# EAGLE board bonkout (EAGLE 9.6.2)
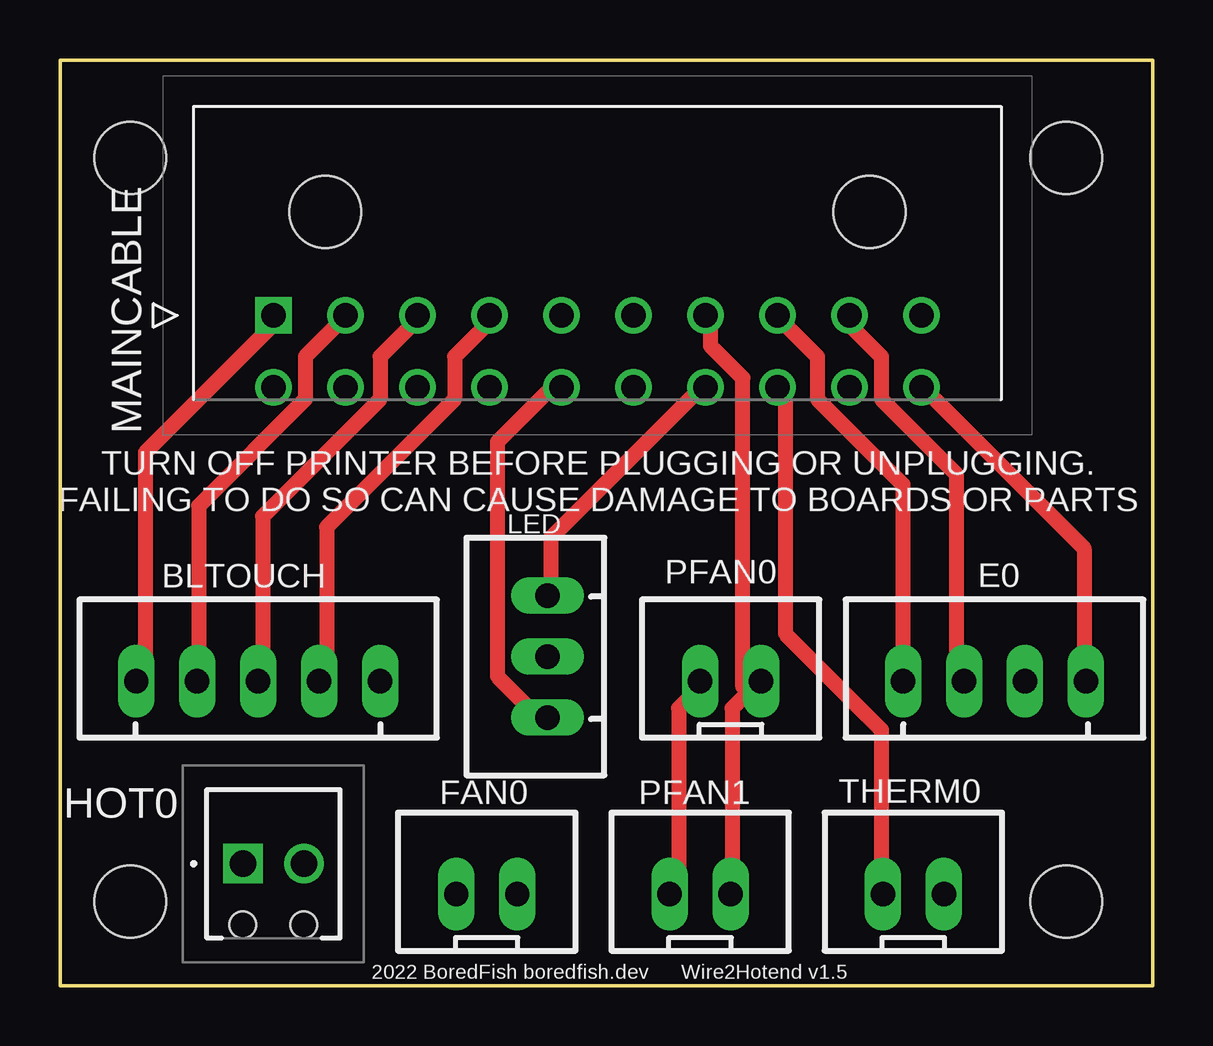
[diagram p0: board, top side]
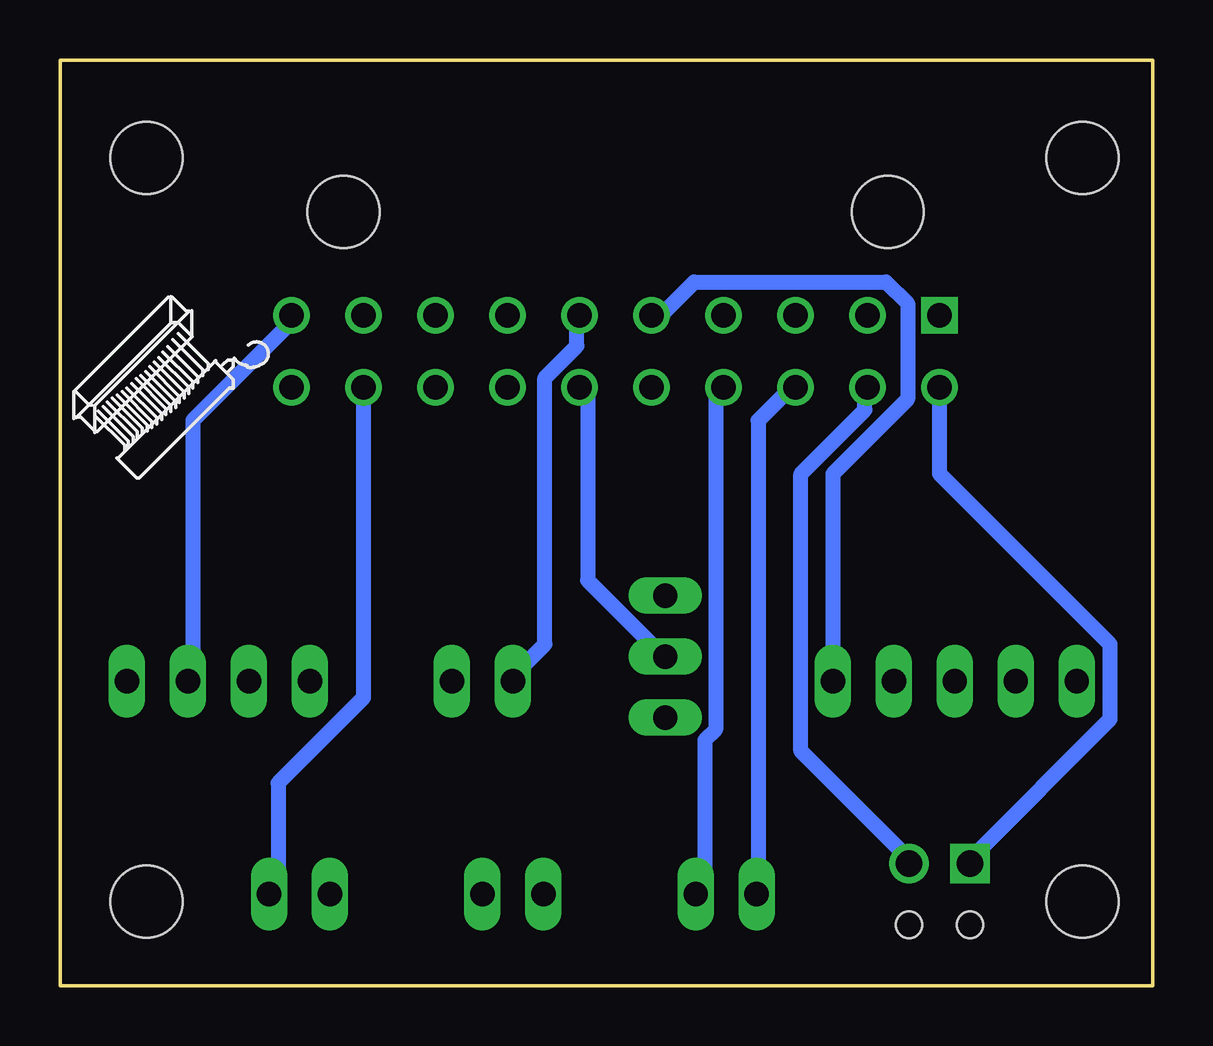
[diagram p1: board, bottom side, seen from below]

Size 45.54 x 38.59 mm. Coordinates in mm from the lower left corner, seen from the top.
Outline: 45.54,38.59 0,38.59 0,0 45.54,0 45.54,38.59
Copper layers (1*16): Top 0.035559375mm / dielectric 1.6mm / Bottom 0.035559375mm
Design rules "oshpark-2layer-auto-routing *": minimum track width 25mil, minimum drill 10mil, track to track 10mil, track to pad 8mil, pad to pad 8mil, via to via 8mil, smd to smd 6mil, copper to edge 15mil, drill to drill 6mil, minimum pad ring 6mil, minimum via ring 6mil, stop-mask expansion 2.5mil, vias tented up to drill 0mil, thermal gap 10mil
Holes 3 mm at 2.93,34.5 2.93,3.5 41.93,3.5 41.93,34.5

## Footprints (pad centres in the part's own frame; a part is rotated, then mirrored left to right if it is on the bottom)
JST-XH-05-PACKAGE-LONG-PAD = drill 1.016 long: 1 -5.08,0; 2 -2.54,0; 3 0,0; 4 2.54,0; 5 5.08,0
JST-XH-04-PACKAGE-LONG-PAD = drill 1.016 long: 1 -3.81,0; 2 -1.27,0; 3 1.27,0; 4 3.81,0
JST-XH-02-PACKAGE-LONG-PAD = drill 1.016 long: 1 -1.27,0; 2 1.27,0
1725656 = drill 1.1 pad 1.65 square: 1 0,0 | drill 1.1 pad 1.65: 2 2.54,0 | hole 1.1: 0,-2.54; 2.54,-2.54
JST-XH-03-PACKAGE-LONG-PAD = drill 1.016 long: 1 -2.54,0; 2 0,0; 3 2.54,0
43045-20(00,01,02,10) = drill 1.02 pad 1.52 square: 1 0,0 | drill 1.02 pad 1.52: 2 -3,0; 3 -6,0; 4 -9,0; 5 -12,0; 6 -15,0; 7 -18,0; 8 -21,0; 9 -24,0; 10 -27,0; 11 0,3; 12 -3,3; 13 -6,3; 14 -9,3; 15 -12,3; 16 -15,3; 17 -18,3; 18 -21,3; 19 -24,3; 20 -27,3 | hole 3: -2.16,-4.32; -24.84,-4.32

## Placement (x,y rotation side)
BLTOUCH  [JST-XH-05-PACKAGE-LONG-PAD]  8.26,12.7 0 top
E0  [JST-XH-04-PACKAGE-LONG-PAD]  38.94,12.7 0 top
FAN0  [JST-XH-02-PACKAGE-LONG-PAD]  17.78,3.81 0 top
HOT0  [1725656]  7.62,5.08 0 top
LED  [JST-XH-03-PACKAGE-LONG-PAD]  20.32,13.72 90 top
MAINCABLE  [43045-20(00,01,02,10)]  8.89,27.94 180 top
PFAN0  [JST-XH-02-PACKAGE-LONG-PAD]  27.94,12.7 0 top
PFAN1  [JST-XH-02-PACKAGE-LONG-PAD]  26.67,3.81 0 top
THERM0  [JST-XH-02-PACKAGE-LONG-PAD]  35.56,3.81 0 top

## Library data of the parts
BLTOUCH E0 FAN0 LED PFAN0 PFAN1 THERM0 = Rembrandt Electronics - JST XH Connectors v1-0
HOT0 MAINCABLE = SamacSys_Parts

## Nets
S$1: BLTOUCH.1 MAINCABLE.1
S$2: LED.3 MAINCABLE.17
S$3: BLTOUCH.3 MAINCABLE.3
S$4: BLTOUCH.2 MAINCABLE.2
S$5: BLTOUCH.4 MAINCABLE.4
S$6: BLTOUCH.5 MAINCABLE.5
S$7: HOT0.1 MAINCABLE.11
S$8: MAINCABLE.6 PFAN0.1 PFAN1.1
S$9: MAINCABLE.7 PFAN0.2 PFAN1.2
S$10: FAN0.2 MAINCABLE.14
S$11: E0.1 MAINCABLE.8
S$12: LED.2 MAINCABLE.16
S$13: E0.2 MAINCABLE.9
S$14: E0.3 MAINCABLE.10
S$15: E0.4 MAINCABLE.20
S$16: MAINCABLE.18 THERM0.1
S$17: MAINCABLE.19 THERM0.2
S$18: LED.1 MAINCABLE.15
S$20: HOT0.2 MAINCABLE.12
S$21: FAN0.1 MAINCABLE.13

## Tracks (layer width: path | path; a pad name or v marks a point on that pad's centre or on a via)
S$1
  Top 0.635: BLTOUCH.1 3.56,12.89 3.56,22.23 8.89,27.56 MAINCABLE.1
S$2
  Top 0.635: LED.3 20.45,16.45 20.45,18.67 26.67,24.89 MAINCABLE.17
S$3
  Top 0.635: BLTOUCH.3 8.45,12.89 8.45,19.56 13.34,24.45 13.34,26.23 14.67,27.56 MAINCABLE.3
S$4
  Top 0.635: BLTOUCH.2 5.78,12.89 5.78,20 10.22,24.45 10.22,26.23 11.56,27.56 MAINCABLE.2
S$5
  Top 0.635: BLTOUCH.4 11.11,12.89 11.11,19.11 16.45,24.45 16.45,26.23 17.78,27.56 MAINCABLE.4
S$6
  Bottom 0.635: BLTOUCH.5 13.34,21.34 10.22,24.45 10.22,28.45 11.11,29.34 19.11,29.34 20.45,28 MAINCABLE.5
S$7
  Bottom 0.635: MAINCABLE.11 8.89,21.34 1.78,14.22 1.78,11.11 7.56,5.33 HOT0.1
S$8
  Top 0.635: PFAN1.1 25.78,4 25.78,11.56 26.67,12.45 PFAN0.1
  Bottom 0.635: MAINCABLE.6 24,27.56 24,26.67 25.34,25.34 25.34,14.22 26.67,12.89 PFAN0.1
S$9
  Top 0.635: 28.67,12.22 28.89,12.45 PFAN0.2 | 28.67,12.22 28,11.56 28,4 PFAN1.2 | MAINCABLE.7 27.11,27.56 27.11,26.67 28.45,25.34 28.45,12.45 28.67,12.22
S$10
  Bottom 0.635: FAN0.2 18.67,4 18.67,10.22 18.22,10.67 18.22,24.89 MAINCABLE.14
S$11
  Top 0.635: E0.1 35.12,12.89 35.12,20.89 31.56,24.45 31.56,26.23 30.23,27.56 MAINCABLE.8
S$12
  Bottom 0.635: LED.2 20.45,13.78 23.56,16.89 23.56,24.89 MAINCABLE.16
S$13
  Top 0.635: E0.2 37.34,12.89 37.34,21.34 34.23,24.45 34.23,26.23 32.89,27.56 MAINCABLE.9
S$14
  Bottom 0.635: E0.3 40.01,12.89 40.01,23.56 36.01,27.56 MAINCABLE.10
S$15
  Top 0.635: E0.4 42.67,12.89 42.67,18.22 36.01,24.89 MAINCABLE.20
S$16
  Top 0.635: THERM0.1 34.23,4 34.23,10.67 30.23,14.67 30.23,24.89 MAINCABLE.18
S$17
  Bottom 0.635: THERM0.2 36.45,4 36.45,8.45 32.89,12 32.89,24.89 MAINCABLE.19
S$18
  Top 0.635: LED.1 20,11.56 19.56,11.56 18.22,12.89 18.22,22.67 20.45,24.89 MAINCABLE.15
S$20
  Bottom 0.635: MAINCABLE.12 12,24.89 12,24 14.67,21.34 14.67,9.78 10.22,5.33 HOT0.2
S$21
  Bottom 0.635: FAN0.1 16.45,4 16.45,23.56 15.11,24.89 MAINCABLE.13

## Text on the board
tNames: TURN OFF PRINTER BEFORE PLUGGING OR UNPLUGGING. / FAILING TO DO SO CAN CAUSE DAMAGE TO BOARDS OR PARTS | Wire2Hotend v1.5 | 2022 BoredFish boredfish.dev